# Altium PCB exam01.PcbDoc
Units mil, origin at the board's own origin, x right, y up, seen from the top; angles counter-clockwise.
Board outline 6000 x 4000 mil, 2 copper layers (Top Layer, Bottom Layer); 6 components, 5 nets, 68 pads, 0 vias.
Unrouted connection lines stored in the file: 3.
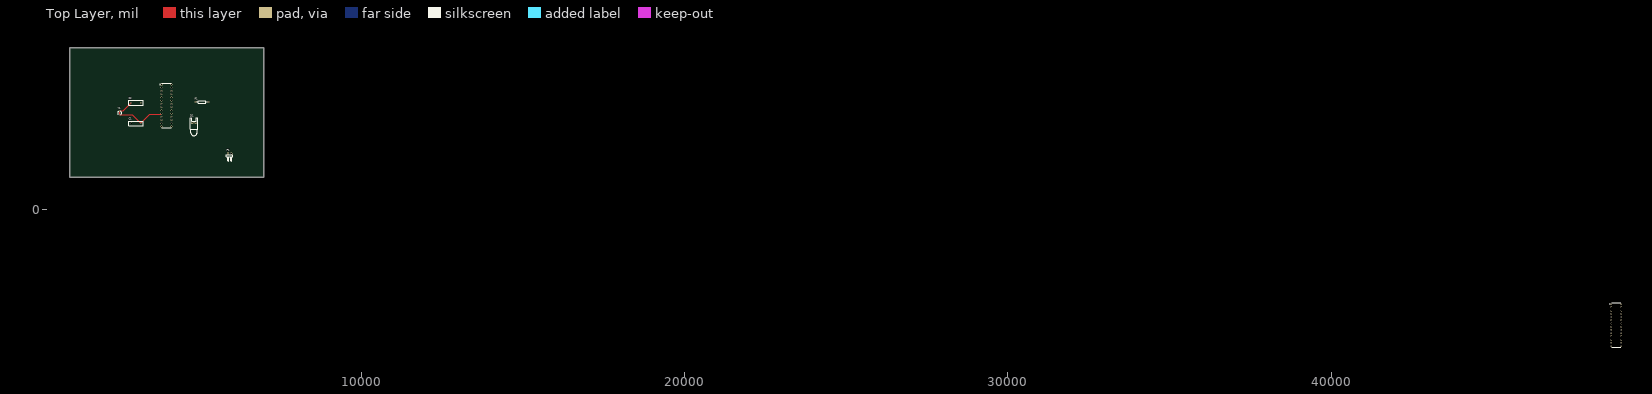
[diagram p0: Top Layer view]
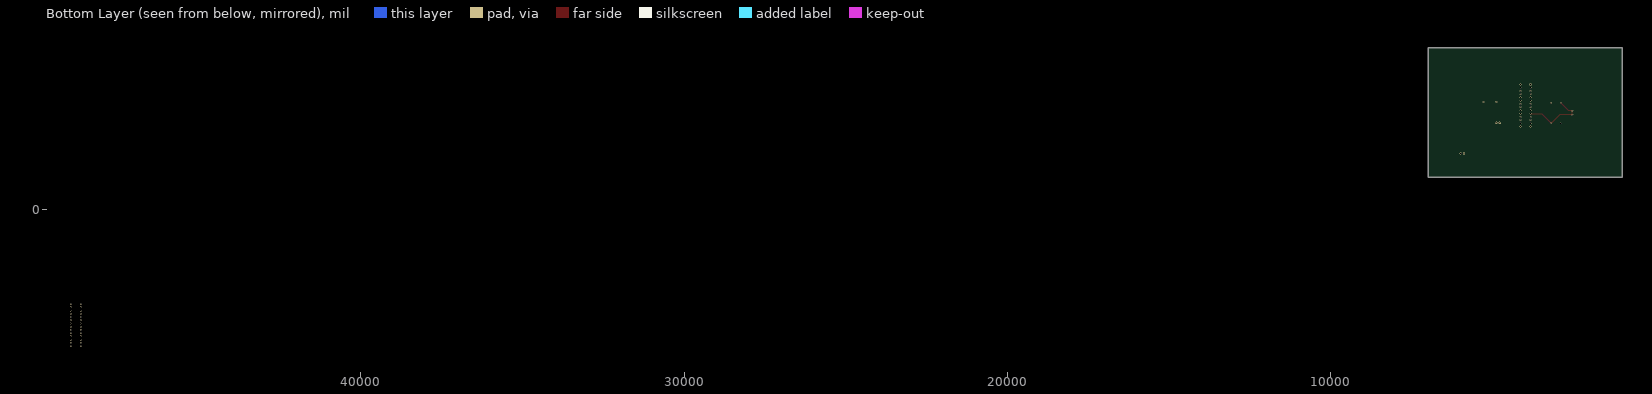
[diagram p1: Bottom Layer view, seen from below]

## Layer stack, top to bottom
Top Solder: solder mask 0.4, Solder Resist, Dk 3.5
Top Layer: signal copper 1.4
Dielectric 1: dielectric 12.6, FR-4, Dk 4.8
Bottom Layer: signal copper 1.4
Bottom Solder: solder mask 0.4, Solder Resist, Dk 3.5

## Board outline
1000,1000 7000,1000 7000,5000 1000,5000

## Design rules (kind name [scope] priority, off if disabled: settings)
Clearance [All] p1: gap=10 ignorepadtopadclearanceinfootprint=FALSE except(0: Arc-Hole Track-Hole SMDPad-Hole THPad-Hole Via-Hole Fill-Hole Poly-Hole Region-Hole Text-Hole)
PolygonConnect [All] p1: connectstyle=Relief reliefconductorwidth=10 reliefentries=4 polygonreliefangle="90 Angle" airgapwidth=10
RoutingVias [All] p1: holewidth=28 width=50 viastyle="Through Hole" minholewidth=28 minwidth=50 maxholewidth=28 maxwidth=50
SolderMaskExpansion [All] p1: expansion=4
Width [All] p1: maxlimit=10 minlimit=10 preferedwidth=10
30 further rules are at their usual default settings.

## Components (designator, comment, footprint, x,y, rotation, side; value= is the part's Value field where it differs from the comment)
C1 "Cap" RAD-0.3 3045,2665 r180 top value=22pF
C2 "Cap" RAD-0.3 3045,3300 r0 top value=22pF
D1 "LED0" LED-0 4835,2685 r0 top
P1 "Power p" HDR1X2H 5890,1740 r0 top
R1 "Res2" AXIAL-0.4 5085,3330 r180 top value=220
Y1 "XTAL" R38 2535,2990 r0 top

## Footprints (in the part's own frame and the unit in brackets; to place one, negate y for a bottom-side part, rotate by r counter-clockwise, add the part's x,y. Pads: shape width x height; smd on the part's side, far side on the other; paste and mask are expansions set on the pad)
AXIAL-0.4 [mm] "Axial Device, Thru-Hole; 2 Leads; 0.4 in Pin Spacing"
  round 1.4 hole 0.85: 1(-5.08,0) 2(5.08,0)
  silkscreen extent -4.06,-1.02 4.06,1.02
HDR1X2H [mm] "Connector; Header; 2 Position; Right Angle"
  rect 1.5x1.5 hole 0.9: 1(0,0)
  round 1.5 hole 0.9: 2(2.54,0)
  silkscreen extent -1.27,-6.35 3.81,-1.27
LED-0 [mil] "LED; 2 Leads"
  round 70 hole 50: 1(50,0) 2(-50,0)
  silkscreen extent -120,-400 120,150
R38 [mm] "Crystal, Thru-Hole; 2 Leads; Body 3.1 x 8.2 mm (Dia.xH)"
  round 1.3 hole 0.7: 1(0,1.55) 2(0,-1.55)
  silkscreen extent -1.55,-1.19 1.55,1.17
RAD-0.3 [mm] "Radial Cap, Thru-Hole; 2 Leads; 0.3 in Pin Spacing"
  round 1.2 hole 0.7: 1(-3.81,0) 2(3.81,0)
  silkscreen extent -5.71,-1.91 5.71,1.91

## Part data
C1 C2: "Capacitor", LatestRevisionDate=17-Jul-2002, LatestRevisionNote="Re-released for DXP Platform.", PackageDescription="Radial Cap, Thru-Hole; 2 Leads; 0.3 in Pin Spacing", PackageReference=RAD-0.3, Published=8-Jun-2000, Publisher="Altium Limited"
D1: "Typical INFRARED GaAs LED", LatestRevisionDate=08-Jul-2005, LatestRevisionNote="Mech Layer 1 removed.", PackageDescription="LED; 2 Leads", PackageReference=LED-0, Published=8-Jun-2000, Publisher="Altium Limited"
P1: library part "Header 2H", "Header, 2-Pin, Right Angle", LatestRevisionDate=17-Jul-2002, LatestRevisionNote="Re-released for DXP Platform.", Publisher="Altium Limited"
R1: "Resistor", LatestRevisionDate=17-Jul-2002, LatestRevisionNote="Re-released for DXP Platform.", PackageDescription="Axial Device, Thru-Hole; 2 Leads; 0.4 in Pin Spacing", PackageReference=AXIAL-0.4, Published=8-Jun-2000, Publisher="Altium Limited"
Y1: "Crystal Oscillator", LatestRevisionDate=17-Jul-2002, LatestRevisionNote="Re-released for DXP Platform.", PackageDescription="Crystal, Thru-Hole; 2 Leads; Body 3.1 x 8.2 mm (Dia.xH)", PackageReference=R38, Published=8-Jun-2000, Publisher="Altium Limited"

## Free pads (board coordinates)
  rect 49.21x49.21 / inner round 49.21 / far side rect 49.21x49.21 hole 32.68: 1(3830,3870) 1(48655,-2920)
  round 49.21 hole 32.68: 2(3830,3770) 2(48655,-3020) 3(3830,3670) 3(48655,-3120) 4(3830,3570) 4(48655,-3220) 5(3830,3470) 5(48655,-3320) 6(3830,3370) 6(48655,-3420) 7(3830,3270) 7(48655,-3520) 8(3830,3170) 8(48655,-3620) 9(3830,3070) 9(48655,-3720) 10(3830,2970) 10(48655,-3820) 11(3830,2870) 11(48655,-3920) 12(3830,2770) 12(48655,-4020) 13(3830,2670) 13(48655,-4120) 14(3830,2570) 14(48655,-4220) 15(4140,2570) 15(48965,-4220) 16(4140,2670) 16(48965,-4120) 17(4140,2770) 17(48965,-4020) 18(4140,2870) 18(48965,-3920) 19(4140,2970) 19(48965,-3820) 20(4140,3070) 20(48965,-3720) 21(4140,3170) 21(48965,-3620) 22(4140,3270) 22(48965,-3520) 23(4140,3370) 23(48965,-3420) 24(4140,3470) 24(48965,-3320) 25(4140,3570) 25(48965,-3220) 26(4140,3670) 26(48965,-3120) 27(4140,3770) 27(48965,-3020) 28(4140,3870) 28(48965,-2920)

## Nets (pads, with @x,y where several pads share a name; then routed paths per layer and width w, separated by ;. In a path a pad name is that pad's centre, name@x,y a point inside that pad or via, vN(x,y) a via of type N, cw(c..) or ccw(c..) an arc to the next point about the centre after c; other vN are vias at no path point)
+5V0: P1.1
GND: C1.1 C2.1 D1.2 P1.2 Y1.1 Y1.2 | length 2076.2
  Top Layer w10: C2.1 2646.02,3051.02 Y1.1 Y1.2 2931.02,2928.98 C1.1 3471.99,2941.99 3801.99,2941.99
NetC1_2: C1.2
NetC2_2: C2.2
NetD1_1: D1.1 R1.2
pads on no net: R1.1

## Silkscreen, mask and mechanical layers (free items; w line width, h text height)
Top Overlay:
  circle w7.87: c3784.21,3870 r3.94
  circle w7.87: c48609.21,-2920 r3.94
  lines w5: 3842.5,2532.8 4127.5,2532.8 ; 3842.5,3907.2 4127.5,3907.2 ; 48667.5,-4257.2 48952.5,-4257.2 ; 48667.5,-2882.8 48952.5,-2882.8
Mechanical 13:
  circle w7.87: c3784.21,3870 r3.94
  circle w7.87: c48609.21,-2920 r3.94
  lines w5: 3842.5,2537.52 4127.5,2537.52 4127.5,3902.48 3842.5,3902.48 3842.5,2537.52 ; 48667.5,-4252.48 48952.5,-4252.48 48952.5,-2887.52 48667.5,-2887.52 48667.5,-4252.48
Mechanical 15:
  lines w1.97: 3795.55,2527.68 4174.45,2527.68 4174.45,3912.32 3795.55,3912.32 3795.55,2527.68 ; 48620.55,-4262.32 48999.45,-4262.32 48999.45,-2877.68 48620.55,-2877.68 48620.55,-4262.32